# Altium PCB Flatcaster-pcb.PcbDoc (part 1 of 2)
Units mil, origin at the board's own origin, x right, y up, seen from the top; angles counter-clockwise.
Board outline 8267.72 x 2755.91 mil, 2 copper layers (Top Layer, Bottom Layer); 203 components, 114 nets, 596 pads, 141 vias.
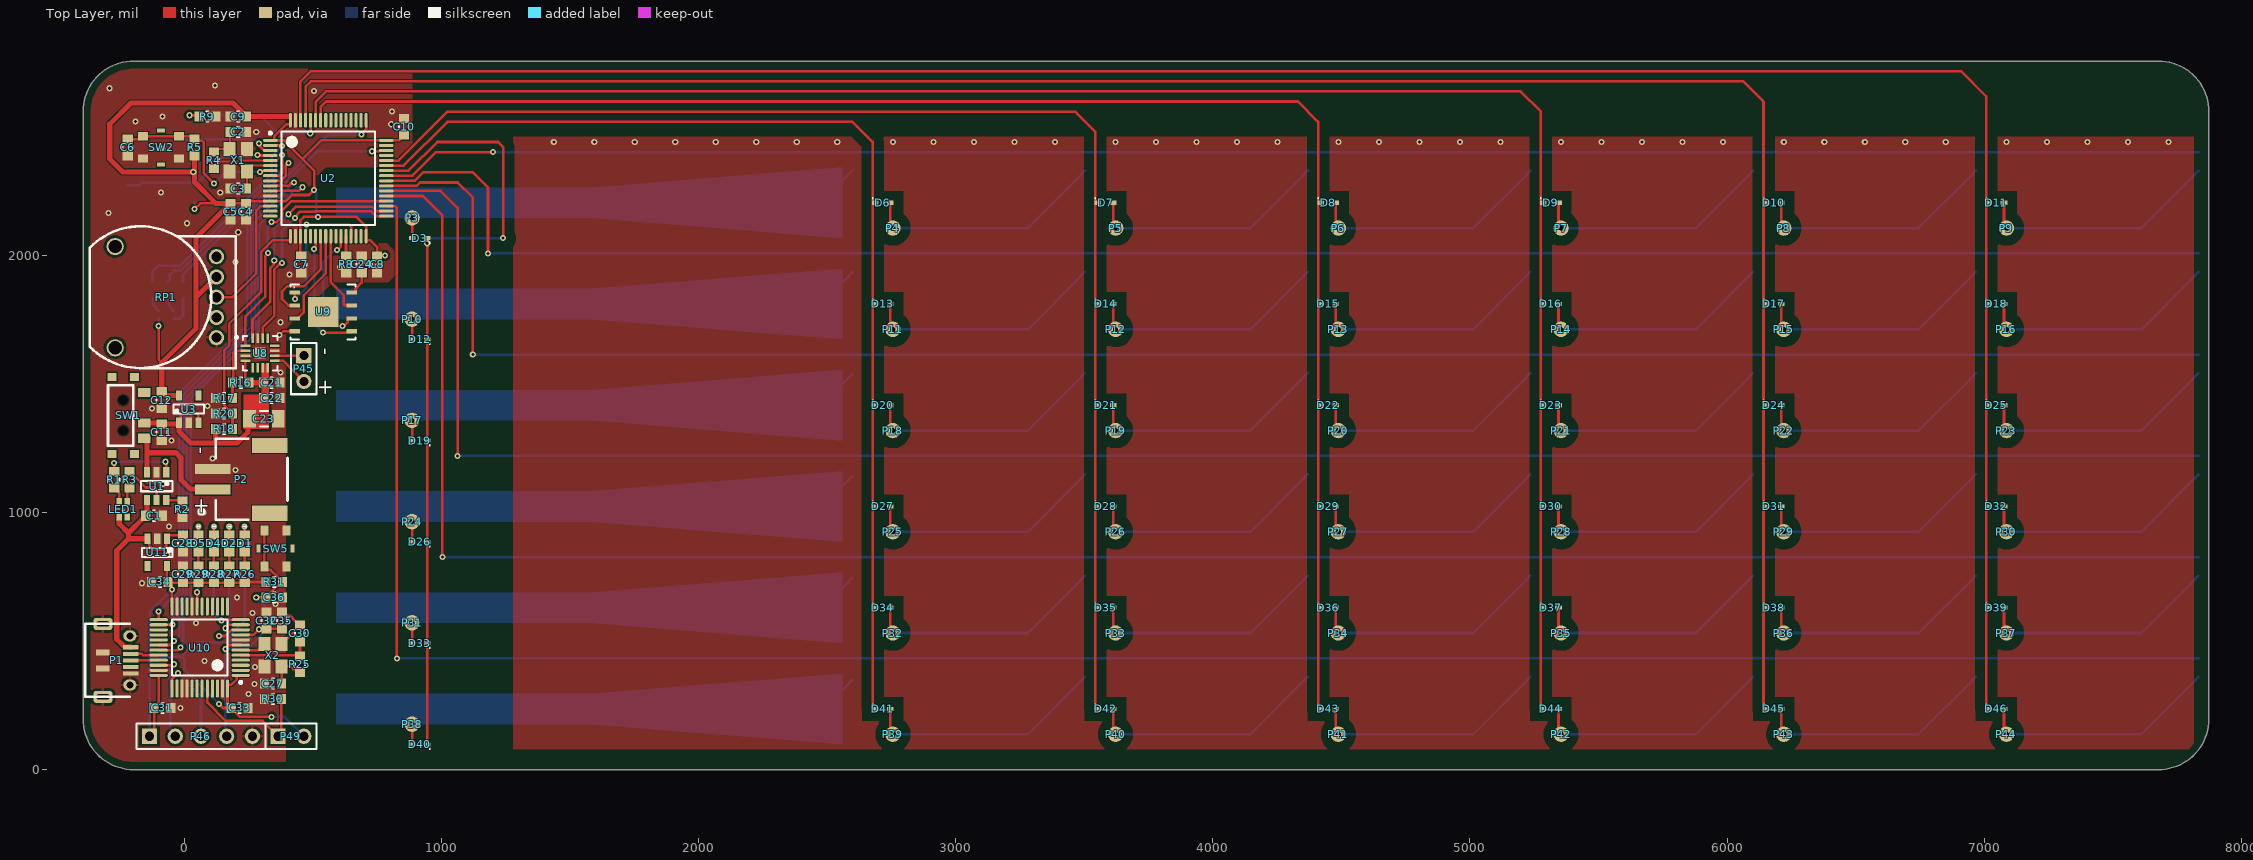
[diagram p0: Top Layer view]
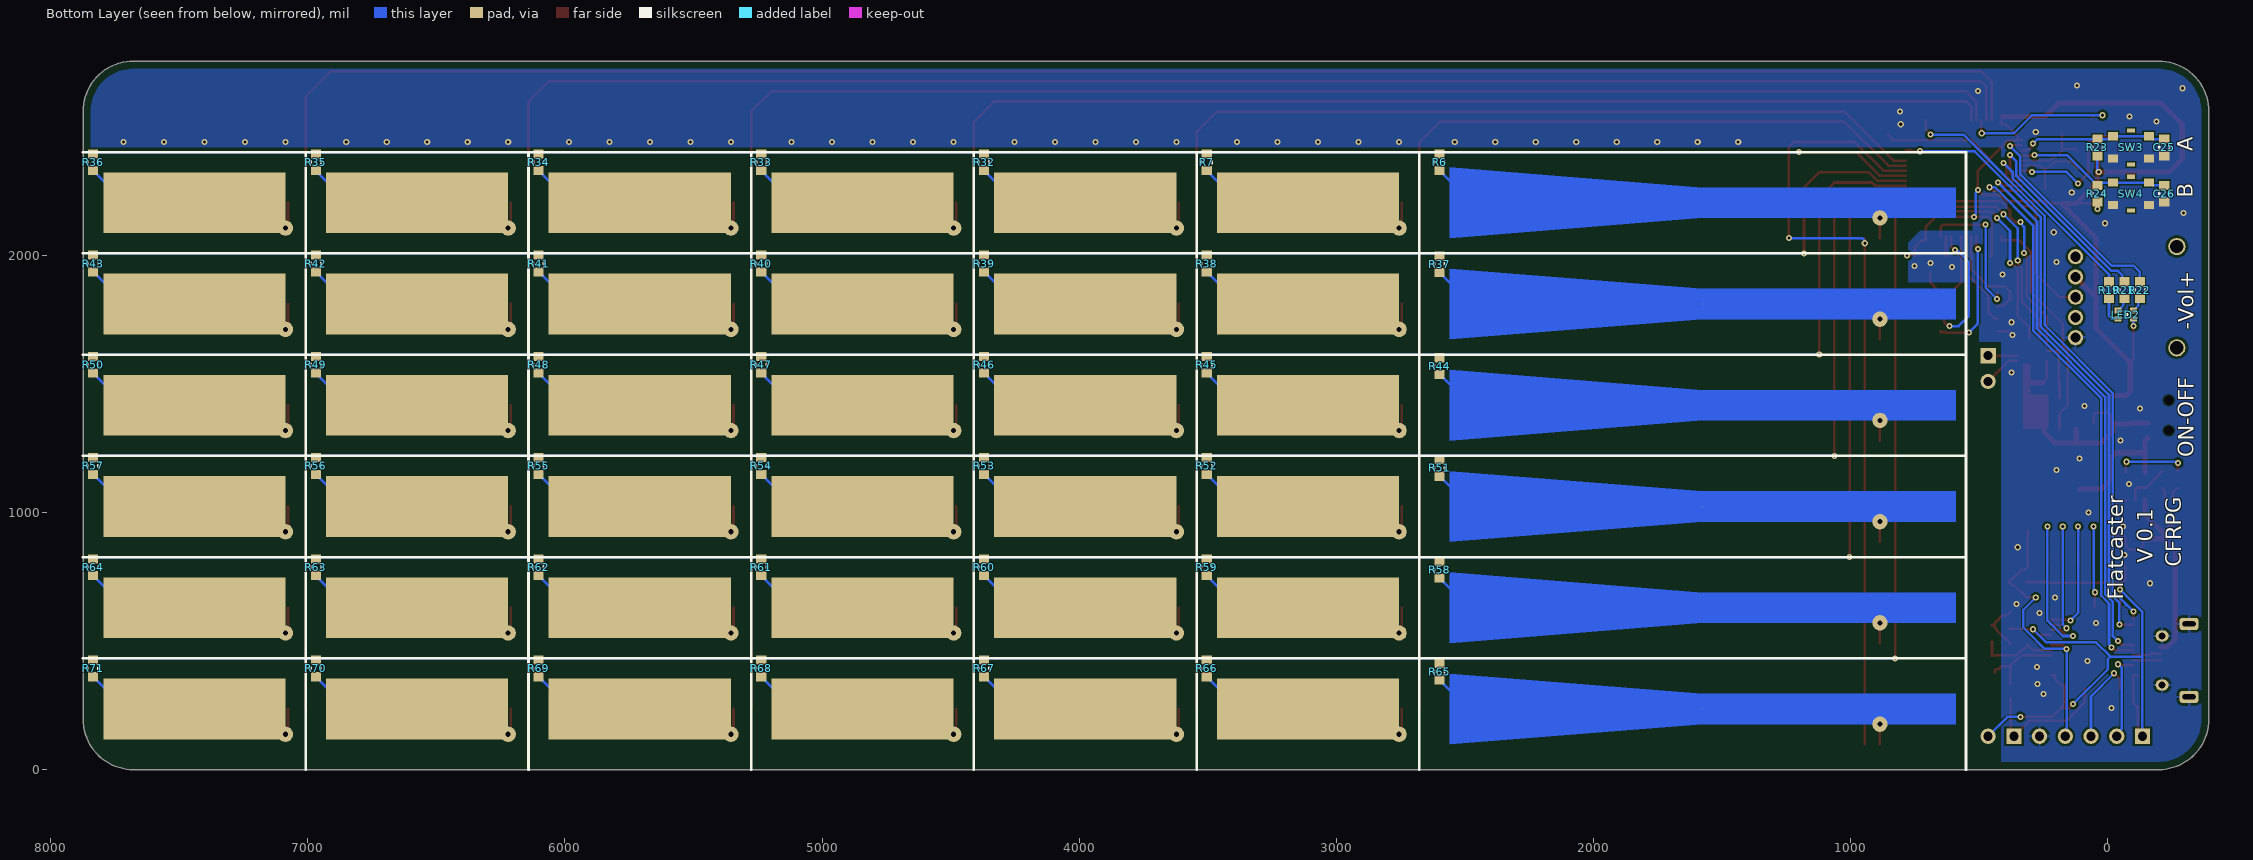
[diagram p1: Bottom Layer view, seen from below]
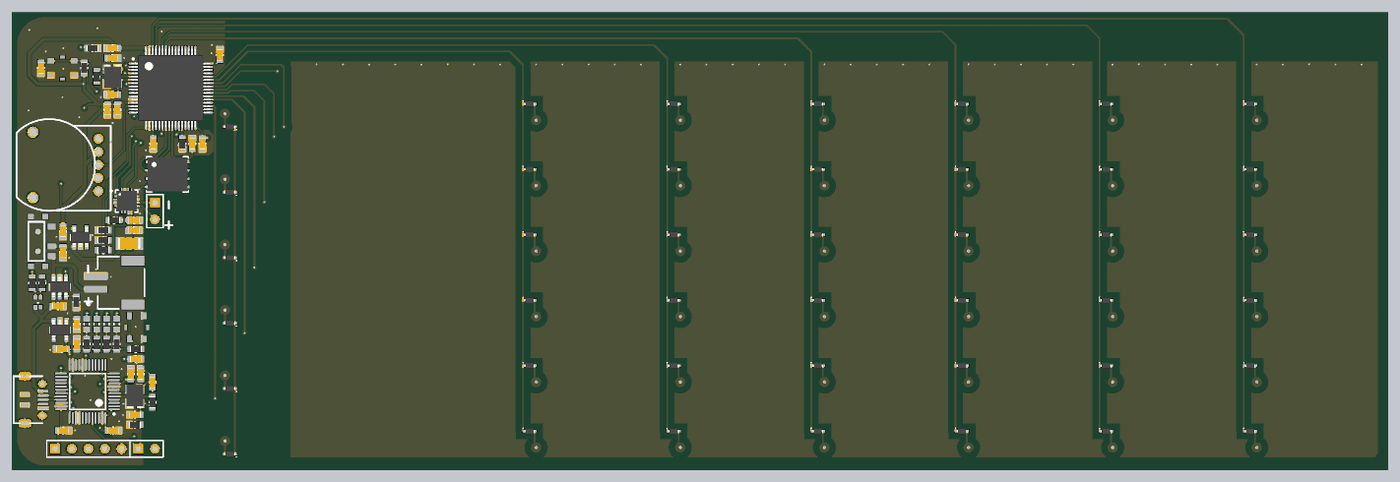
[diagram p3: 3D render of the assembled board from above, using the file's embedded part models]
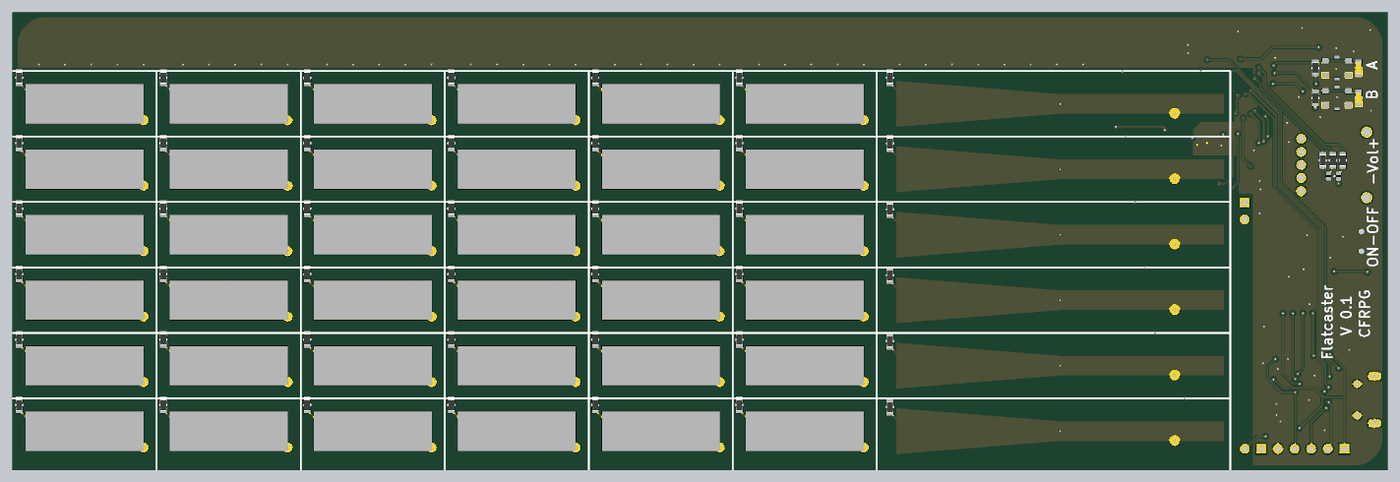
[diagram p4: 3D render of the assembled board from below, using the file's embedded part models]

## Layer stack, top to bottom
Top Solder: solder mask 0.4, Solder Resist, Dk 3.5
Top Layer: signal copper 1.4
Dielectric 1: dielectric 12.6, FR-4, Dk 4.8
Bottom Layer: signal copper 1.4
Bottom Solder: solder mask 0.4, Solder Resist, Dk 3.5

## Board outline
-196.85,0 cw(c-196.85,196.85) -393.7,196.85 -393.7,2559.06 cw(c-196.85,2559.05) -196.85,2755.91 7677.17,2755.9 cw(c7677.17,2559.05) 7874.02,2559.06 7874.02,196.85 cw(c7677.17,196.85) 7677.17,0

## Design rules (kind name [scope] priority, off if disabled: settings)
BoardOutlineClearance [All] p1: gap=15.75 ignorepadtopadclearanceinfootprint=FALSE except(30: Poly-OutlineEdge Poly-CavityEdge Poly-CutoutEdge Poly-SplitBarrior Poly-SplitContinuation)
Clearance Clearance_1 [InNamedPolygon('CAP_GND_L01_P003') Or InNamedPolygon('CAP_GND_L01_P004') Or InNamedPolygon('CAP_GND_L01_P005') Or InNamedPolygon('CAP_GND_L01_P006') Or InNamedPolygon('CAP_GND_L01_P007') Or InNamedPolygon('CAP_GND_L01_P008')] p1: gap=39.37 ignorepadtopadclearanceinfootprint=FALSE
Clearance [All] p2: gap=5 ignorepadtopadclearanceinfootprint=TRUE except(10: THPad-Fill THPad-Poly THPad-Region Via-Fill Via-Poly Via-Region Fill-Fill Fill-Poly Fill-Region Poly-Poly Poly-Region Region-Region)
PolygonConnect [All] p1: thpad.connectstyle=Relief thpad.reliefconductorwidth=10 thpad.reliefentries=4 thpad.polygonreliefangle="90 Angle" thpad.airgapwidth=10 smdpad.connectstyle=Direct smdpad.reliefconductorwidth=10 smdpad.reliefentries=4 smdpad.polygonreliefangle="90 Angle" smdpad.airgapwidth=10 via.connectstyle=Direct via.reliefconductorwidth=10 via.reliefentries=4 via.polygonreliefangle="90 Angle" via.airgapwidth=10
RoutingVias [All] p1: holewidth=11.81 width=23.62 viastyle="Through Hole" minholewidth=11.81 minwidth=23.62 maxholewidth=157.48 maxwidth=196.85
SolderMaskExpansion [All] p1: expansion=4 istentingtop=FALSE
SupplyNets "Schematic Supply Nets_18" [InNet('VBUS')] p1: voltage=0.000
SupplyNets "Schematic Supply Nets_17" [InNet('VCC_Link')] p2: voltage=0.000
SupplyNets "Schematic Supply Nets_16" [InNet('VCC_MCU')] p3: voltage=0.000
SupplyNets "Schematic Supply Nets_5" [InNet('VBAT')] p4: voltage=0.000
SupplyNets "Schematic Supply Nets_13" [InNet('+5')] p5: voltage=0.000
SupplyNets "Schematic Supply Nets_3" [InNet('VCC')] p6: voltage=0.000
SupplyNets "Schematic Supply Nets" [InNet('GND')] p7: voltage=0.000
Width [All] p1: maxlimit=20 minlimit=8 preferedwidth=10 minimp=50.000000 maximp=50.000000 favimp=50.000000
30 further rules are at their usual default settings.

## Classes and differential pairs
component class Flatcaster-sch: C1 C2 C3 C4 C5 C6 C7 C8 C9 C10 C11 C12 C21 C22 C23 C24 C25 C26 D3 D6 D7 D8 D9 D10 D11 D12 D13 D14 D15 D16 D17 D18 D19 D20 D21 D22 D23 D24 D25 D26 D27 D28 D29 D30 D31 D32 D33 D34 D35 D36 D37 D38 D39 D40 D41 D42 D43 D44 D45 D46 LED1 LED2 P1 P2 P3 P4 P5 P6 P7 P8 P9 P10 P11 P12 P13 P14 P15 P16 P17 P18 P19 P20 P21 P22 P23 P24 P25 P26 P27 P28 P29 P30 P31 P32 P33 P34 P35 P36 P37 P38 P39 P40 P41 P42 P43 P44 P45 R1 R2 R3 R4 R5 R6 R7 R8 R9 R16 R17 R18 R19 R20 R21 R22 R23 R24 R32 R33 R34 R35 R36 R37 R38 R39 R40 R41 R42 R43 R44 R45 R46 R47 R48 R49 R50 R51 R52 R53 R54 R55 R56 R57 R58 R59 R60 R61 R62 R63 R64 R65 R66 R67 R68 R69 R70 R71 RP1 SW1 SW2 SW3 SW4 U1 U2 U3 U8 U9 X1
component class Flatcaster-Link-sch: C27 C28 C29 C30 C31 C32 C33 C34 C35 C36 D1 D2 D4 D5 P46 P49 R25 R26 R27 R28 R29 R30 R31 SW5 U10 U11 X2

## Components (designator, comment, footprint, x,y, rotation, side; value= is the part's Value field where it differs from the comment)
C1 "2.2uF" 0603-Cap -117.5,987.5 r180 top
C2 "12pF" 0603-Cap 210,2480 r180 top
C3 "12pF" 0603-Cap 210,2260 r0 top
C4 "100nF" 0603-Cap 240,2170 r90 top
C5 "1uF" 0603-Cap 180,2170 r90 top
C6 "1uF" 0603-Cap -220,2420 r90 top
C7 "100nF" 0603-Cap 455,1965 r90 top
C8 "100nF" 0603-Cap 750,1965 r90 top
C9 "100nF" 0603-Cap 210,2540 r0 top
C10 "100nF" 0603-Cap 855,2500 r270 top
C11 "1uF" 0603-Cap -87.5,1312.5 r90 top
C12 "1uF" 0603-Cap -87.5,1437.5 r90 top
C21 "100nF" 0603-Cap 340,1505 r180 top
C22 "1uF" 0603-Cap 340,1445 r180 top
C23 "100uF" 1206-C 310,1365 r180 top
C24 "100nF" 0603-Cap 690,1965 r270 top
C25 "1uF" 0603-Cap -220,2420 r90 bottom
C26 "1uF" 0603-Cap -220,2240 r90 bottom
C27 "12pF" 0603-Cap 345,335 r0 top
C28 "1uF" 0603-Cap -5,880 r90 top
C29 "1uF" 0603-Cap -5,760 r270 top
C30 "12pF" 0603-Cap 450,530 r270 top
C31 "100nF" 0603-Cap -85,240 r0 top
C32 "100nF" 0603-Cap 320,580 r90 top
C33 "100nF" 0603-Cap 215,240 r0 top
C34 "100nF" 0603-Cap -95,730 r180 top
C35 "4.7uF" 0603-Cap 380,580 r90 top
C36 "1uF" 0603-Cap 350,670 r180 top
D1 "LED" 0603-1 235,880 r90 top
D2 "LED" 0603-1 175,880 r90 top
D3 "RB751S40T5G" SOD-523 915.35,2066.93 r180 top
D4 "LED" 0603-1 115,880 r90 top
D5 "LED" 0603-1 55,880 r90 top
D6 "RB751S40T5G" SOD-523 2716.54,2204.72 r0 top
D7 "RB751S40T5G" SOD-523 3582.68,2204.72 r0 top
D8 "RB751S40T5G" SOD-523 4448.82,2204.72 r0 top
D9 "RB751S40T5G" SOD-523 5314.96,2204.72 r0 top
D10 "RB751S40T5G" SOD-523 6181.1,2204.72 r0 top
D11 "RB751S40T5G" SOD-523 7047.24,2204.72 r0 top
D12 "RB751S40T5G" SOD-523 915.35,1673.23 r180 top
D13 "RB751S40T5G" SOD-523 2716.54,1811.02 r0 top
D14 "RB751S40T5G" SOD-523 3582.68,1811.02 r0 top
D15 "RB751S40T5G" SOD-523 4448.82,1811.02 r0 top
D16 "RB751S40T5G" SOD-523 5314.96,1811.02 r0 top
D17 "RB751S40T5G" SOD-523 6181.1,1811.02 r0 top
D18 "RB751S40T5G" SOD-523 7047.24,1811.02 r0 top
D19 "RB751S40T5G" SOD-523 915.35,1279.53 r180 top
D20 "RB751S40T5G" SOD-523 2716.54,1417.32 r0 top
D21 "RB751S40T5G" SOD-523 3582.68,1417.32 r0 top
D22 "RB751S40T5G" SOD-523 4448.82,1417.32 r0 top
D23 "RB751S40T5G" SOD-523 5314.96,1417.32 r0 top
D24 "RB751S40T5G" SOD-523 6181.1,1417.32 r0 top
D25 "RB751S40T5G" SOD-523 7047.24,1417.32 r0 top
D26 "RB751S40T5G" SOD-523 915.35,885.83 r180 top
D27 "RB751S40T5G" SOD-523 2716.54,1023.62 r0 top
D28 "RB751S40T5G" SOD-523 3582.68,1023.62 r0 top
D29 "RB751S40T5G" SOD-523 4448.82,1023.62 r0 top
D30 "RB751S40T5G" SOD-523 5314.96,1023.62 r0 top
D31 "RB751S40T5G" SOD-523 6181.1,1023.62 r0 top
D32 "RB751S40T5G" SOD-523 7047.24,1023.62 r0 top
D33 "RB751S40T5G" SOD-523 915.35,492.13 r180 top
D34 "RB751S40T5G" SOD-523 2716.54,629.92 r0 top
D35 "RB751S40T5G" SOD-523 3582.68,629.92 r0 top
D36 "RB751S40T5G" SOD-523 4448.82,629.92 r0 top
D37 "RB751S40T5G" SOD-523 5314.96,629.92 r0 top
D38 "RB751S40T5G" SOD-523 6181.1,629.92 r0 top
D39 "RB751S40T5G" SOD-523 7047.24,629.92 r0 top
D40 "RB751S40T5G" SOD-523 915.35,98.43 r180 top
D41 "RB751S40T5G" SOD-523 2716.54,236.22 r0 top
D42 "RB751S40T5G" SOD-523 3582.68,236.22 r0 top
D43 "RB751S40T5G" SOD-523 4448.82,236.22 r0 top
D44 "RB751S40T5G" SOD-523 5314.96,236.22 r0 top
D45 "RB751S40T5G" SOD-523 6181.1,236.22 r0 top
D46 "RB751S40T5G" SOD-523 7047.24,236.22 r0 top
LED1 "RGB_CA" RGB1.6*1.6 -237.5,1012.5 r0 top
LED2 "LTST-C19HE1WT-H" RGB1.6*1.6 -70,1770 r90 bottom
P1 "MicroUSB" MicroUSB -385,425 r270 top
P2 "Header 2" "SH2.0 2P" 110,1090 r270 top
P3 "TestPoint" TestPoint 885.83,2145.67 r180 top
P4 "TestPoint" TestPoint 2755.91,2106.3 r180 top
P5 "TestPoint" TestPoint 3622.05,2106.3 r180 top
P6 "TestPoint" TestPoint 4488.19,2106.3 r180 top
P7 "TestPoint" TestPoint 5354.33,2106.3 r180 top
P8 "TestPoint" TestPoint 6220.47,2106.3 r180 top
P9 "TestPoint" TestPoint 7086.61,2106.3 r180 top
P10 "TestPoint" TestPoint 885.83,1751.97 r270 top
P11 "TestPoint" TestPoint 2755.91,1712.6 r180 top
P12 "TestPoint" TestPoint 3622.05,1712.6 r270 top
P13 "TestPoint" TestPoint 4488.19,1712.6 r270 top
P14 "TestPoint" TestPoint 5354.33,1712.6 r270 top
P15 "TestPoint" TestPoint 6220.47,1712.6 r270 top
P16 "TestPoint" TestPoint 7086.61,1712.6 r270 top
P17 "TestPoint" TestPoint 885.83,1358.27 r270 top
P18 "TestPoint" TestPoint 2755.91,1318.9 r270 top
P19 "TestPoint" TestPoint 3622.05,1318.9 r270 top
P20 "TestPoint" TestPoint 4488.19,1318.9 r270 top
P21 "TestPoint" TestPoint 5354.33,1318.9 r180 top
P22 "TestPoint" TestPoint 6220.47,1318.9 r270 top
P23 "TestPoint" TestPoint 7086.61,1318.9 r270 top
P24 "TestPoint" TestPoint 885.83,964.57 r270 top
P25 "TestPoint" TestPoint 2755.91,925.2 r270 top
P26 "TestPoint" TestPoint 3622.05,925.2 r270 top
P27 "TestPoint" TestPoint 4488.19,925.2 r270 top
P28 "TestPoint" TestPoint 5354.33,925.2 r270 top
P29 "TestPoint" TestPoint 6220.47,925.2 r270 top
P30 "TestPoint" TestPoint 7086.61,925.2 r270 top
P31 "TestPoint" TestPoint 885.83,570.87 r180 top
P32 "TestPoint" TestPoint 2755.91,531.5 r270 top
P33 "TestPoint" TestPoint 3622.05,531.5 r270 top
P34 "TestPoint" TestPoint 4488.19,531.5 r270 top
P35 "TestPoint" TestPoint 5354.33,531.5 r270 top
P36 "TestPoint" TestPoint 6220.47,531.5 r270 top
P37 "TestPoint" TestPoint 7086.61,531.5 r270 top
P38 "TestPoint" TestPoint 885.83,177.17 r270 top
P39 "TestPoint" TestPoint 2755.91,137.8 r270 top
P40 "TestPoint" TestPoint 3622.05,137.8 r270 top
P41 "TestPoint" TestPoint 4488.19,137.8 r180 top
P42 "TestPoint" TestPoint 5354.33,137.8 r270 top
P43 "TestPoint" TestPoint 6220.47,137.8 r270 top
P44 "TestPoint" TestPoint 7086.61,137.8 r270 top
P45 "Header 2" HDR1X2 465,1610 r270 top
P46 "Header 5" HDR1X5 -135,130 r0 top
P49 "Header 2" HDR1X2 365,130 r0 top
R1 "1k" 0603 -272.5,1127.5 r90 top
R2 "2k" 0603 -7.5,1012.5 r270 top
R3 "1k" 0603 -212.5,1127.5 r90 top
R4 "1M" 0603 115,2370 r90 top
R5 "10k" 0603 40,2420 r90 top
R6 "470k" 0603 2598.43,2362.2 r270 bottom
R7 "470k" 0603 3503.94,2362.2 r270 bottom
R8 "10k" 0603 630,1965 r90 top
R9 "10k" 0603 90,2540 r180 top
R16 "NC" 0603 220,1505 r180 top
R17 "0R" 0603 155,1445 r0 top
R18 "1k" 0603 155,1325 r180 top
R19 "1k" 0603 -5,1865 r90 bottom
R20 "1k" 0603 155,1385 r0 top
R21 "1k" 0603 -65,1865 r90 bottom
R22 "1k" 0603 -125,1865 r90 bottom
R23 "10k" 0603 40,2420 r90 bottom
R24 "10k" 0603 40,2240 r90 bottom
R25 "1M" 0603 450,410 r270 top
R26 "1k" 0603 235,760 r270 top
R27 "1k" 0603 175,760 r270 top
R28 "1k" 0603 115,760 r270 top
R29 "1k" 0603 55,760 r270 top
R30 "10k" 0603 345,275 r180 top
R31 "10k" 0603 350,730 r0 top
R32 "470k" 0603 4370.08,2362.2 r270 bottom
R33 "470k" 0603 5236.22,2362.2 r270 bottom
R34 "470k" 0603 6102.36,2362.2 r270 bottom
R35 "470k" 0603 6968.5,2362.2 r270 bottom
R36 "470k" 0603 7834.65,2362.2 r270 bottom
R37 "470k" 0603 2598.43,1965.94 r270 bottom
R38 "470k" 0603 3503.94,1968.5 r270 bottom
R39 "470k" 0603 4370.08,1968.5 r270 bottom
R40 "470k" 0603 5236.22,1968.5 r270 bottom
R41 "470k" 0603 6102.36,1968.5 r270 bottom
R42 "470k" 0603 6968.5,1968.5 r270 bottom
R43 "470k" 0603 7834.65,1968.5 r270 bottom
R44 "470k" 0603 2598.43,1569.68 r270 bottom
R45 "470k" 0603 3503.94,1574.8 r270 bottom
R46 "470k" 0603 4370.08,1574.8 r270 bottom
R47 "470k" 0603 5236.22,1574.8 r270 bottom
R48 "470k" 0603 6102.36,1574.8 r270 bottom
R49 "470k" 0603 6968.5,1574.8 r270 bottom
R50 "470k" 0603 7834.65,1574.8 r270 bottom
R51 "470k" 0603 2598.43,1173.43 r270 bottom
R52 "470k" 0603 3503.94,1181.1 r270 bottom
R53 "470k" 0603 4370.08,1181.1 r270 bottom
R54 "470k" 0603 5236.22,1181.1 r270 bottom
R55 "470k" 0603 6102.36,1181.1 r270 bottom
R56 "470k" 0603 6968.5,1181.1 r270 bottom
R57 "470k" 0603 7834.65,1181.1 r270 bottom
R58 "470k" 0603 2598.43,777.17 r270 bottom
R59 "470k" 0603 3503.94,787.4 r270 bottom
R60 "470k" 0603 4370.08,787.4 r270 bottom
R61 "470k" 0603 5236.22,787.4 r270 bottom
R62 "470k" 0603 6102.36,787.4 r270 bottom
R63 "470k" 0603 6968.5,787.4 r270 bottom
R64 "470k" 0603 7834.65,787.4 r270 bottom
R65 "470k" 0603 2598.43,380.91 r270 bottom
R66 "470k" 0603 3503.94,393.7 r270 bottom
R67 "470k" 0603 4370.08,393.7 r270 bottom
R68 "470k" 0603 5236.22,393.7 r270 bottom
R69 "470k" 0603 6102.36,393.7 r270 bottom
R70 "470k" 0603 6968.5,393.7 r270 bottom
R71 "470k" 0603 7834.65,393.7 r270 bottom
RP1 "RPx2" RK10J -170.28,1837.48 r90 top
SW1 "SW-SPDT" TA-3524A-A1 -237.5,1377.5 r90 top
SW2 "TS-1177" BTN3*3 -90,2420 r0 top
SW3 "TS-1177" BTN3*3 -90,2420 r180 bottom
SW4 "TS-1177" BTN3*3 -90,2240 r180 bottom
SW5 "TS-1177" BTN3*3 355,860 r90 top
U1 "TP4057ST26P" SOT236 -107.5,1102.5 r270 top
U2 "AT32F435RxT7" LQFP-64 560,2300 r0 top
U3 "TPS7A2033PDBV" SOT23-5 17.5,1402.5 r90 top
U8 "MAX98357A" QFN16-0.5-1.1PAD 295,1620 r0 top
U9 "W25Q256JVEIQ" WPDFN-8-6x5 540,1780 r0 top
U10 "AT32F403ACGT" STM-LQFP48_N 60,475 r180 top
U11 "TPS7A2033PDBV" SOT23-5 -105,845 r270 top
X1 "8M" XTAL-3225-4P 210,2370 r90 top
X2 "8M" XTAL-3225-4P 345,445 r270 top

## Footprints (in the part's own frame and the unit in brackets; to place one, negate y for a bottom-side part, rotate by r counter-clockwise, add the part's x,y. Pads: shape width x height; smd on the part's side, far side on the other; paste and mask are expansions set on the pad)
0603 [mm]
  rect 0.9x1 smd: 1(-0.825,0) 2(0.825,0)
  silkscreen extent -0.1,-0.5 0.1,0.5, body extent -0.87,-0.48 0.87,0.48, height 0.5
0603-1 [mm]
  rect 0.9x1 smd: 1(-0.825,0) 2(0.825,0)
  silkscreen extent -0.1,-0.4 1.65,0.4
0603-Cap [mm]
  rect 0.9x1 smd: 1(-0.825,0) 2(0.825,0)
  silkscreen extent -0.1,-0.5 0.1,0.5, body extent -0.87,-0.48 0.87,0.48, height 0.5
1206-C [mm] "Chip Capacitor, 2-Leads, Body 3.20x1.60mm, IPC Medium Density"
  rect 1.25x1.75 smd: 1(-1.425,0) 2(1.425,0)
  silkscreen extent -0.4,-0.77 0.4,0.77, body extent -1.7,-0.85 1.7,0.85, height 1.2
BTN3*3 [mm]
  rect 1x0.8 smd: 1(-1.775,1.1) 1(1.775,1.1) 2(-1.775,-1.1) 2(1.775,-1.1)
  rect 0.8x0.4 smd: ""(0,-1.675) ""(0,1.675)
HDR1X2 [mm] "Connector; Header; 2 Position"
  rect 1.5x1.5 hole 0.9: 1(0,0)
  round 1.5 hole 0.9: 2(2.54,0)
  silkscreen extent -1.27,-1.27 3.81,1.27
HDR1X5 [mm] "Connector; Header; 5 Position"
  rect 1.5x1.5 hole 0.9: 1(0,0)
  round 1.5 hole 0.9: 2(2.54,0) 3(5.08,0) 4(7.62,0) 5(10.16,0)
  silkscreen extent -1.27,-1.27 11.43,1.27
LQFP-64 [mm] "TSQFP, 64-Leads, Body 10.00x10.00mm, Pitch 0.50mm, IPC Medium Density"
  oval 1.45x0.3 smd: 1(-5.725,3.75) 2(-5.725,3.25) 3(-5.725,2.75) 4(-5.725,2.25) 5(-5.725,1.75) 6(-5.725,1.25) 7(-5.725,0.75) 8(-5.725,0.25) 9(-5.725,-0.25) 10(-5.725,-0.75) 11(-5.725,-1.25) 12(-5.725,-1.75) 13(-5.725,-2.25) 14(-5.725,-2.75) 15(-5.725,-3.25) 16(-5.725,-3.75) 33(5.725,-3.75) 34(5.725,-3.25) 35(5.725,-2.75) 36(5.725,-2.25) 37(5.725,-1.75) 38(5.725,-1.25) 39(5.725,-0.75) 40(5.725,-0.25) 41(5.725,0.25) 42(5.725,0.75) 43(5.725,1.25) 44(5.725,1.75) 45(5.725,2.25) 46(5.725,2.75) 47(5.725,3.25) 48(5.725,3.75)
  oval 0.3x1.45 smd: 17(-3.75,-5.725) 18(-3.25,-5.725) 19(-2.75,-5.725) 20(-2.25,-5.725) 21(-1.75,-5.725) 22(-1.25,-5.725) 23(-0.75,-5.725) 24(-0.25,-5.725) 25(0.25,-5.725) 26(0.75,-5.725) 27(1.25,-5.725) 28(1.75,-5.725) 29(2.25,-5.725) 30(2.75,-5.725) 31(3.25,-5.725) 32(3.75,-5.725) 49(3.75,5.725) 50(3.25,5.725) 51(2.75,5.725) 52(2.25,5.725) 53(1.75,5.725) 54(1.25,5.725) 55(0.75,5.725) 56(0.25,5.725) 57(-0.25,5.725) 58(-0.75,5.725) 59(-1.25,5.725) 60(-1.75,5.725) 61(-2.25,5.725) 62(-2.75,5.725) 63(-3.25,5.725) 64(-3.75,5.725)
  silkscreen extent -5.85,-4.6 4.6,4.6, body extent -6,-6 6,6, height 1.45
MicroUSB [mm]
  rect 0.4x1.55 smd: 1(-1.3,4.5) 2(-0.65,4.5) 3(0,4.5) 4(0.65,4.5) 5(1.3,4.5)
  rrect50% 1.2x1.9 hole 1.3 slot 0.5 at 0 deg: 6(-3.6,1.75) 6(3.6,1.75)
  oval 1.1x1.3 hole 0.7: 6(-2.425,4.4) 6(2.425,4.4)
  rect 0.6x1.35 smd: 6(-0.8,1.725) 6(0.8,1.725)
  silkscreen extent -3.6,0 3.6,4.4
QFN16-0.5-1.1PAD [mm] "QFN, 16-Leads, Body 3.00x3.00mm, Pitch 0.50mm, Thermal Pad 1.10x1.10mm, IPC Medium Density"
  rect 0.95x0.25 smd: 1(-1.45,0.75) 2(-1.45,0.25) 3(-1.45,-0.25) 4(-1.45,-0.75) 9(1.45,-0.75) 10(1.45,-0.25) 11(1.45,0.25) 12(1.45,0.75)
  rect 0.25x0.95 smd: 5(-0.75,-1.45) 6(-0.25,-1.45) 7(0.25,-1.45) 8(0.75,-1.45) 13(0.75,1.45) 14(0.25,1.45) 15(-0.25,1.45) 16(-0.75,1.45)
  rect 1.1x1.1 smd: 17(0,0)
  silkscreen extent -2.47,-1.7 1.7,1.7, body extent -1.6,-1.6 1.6,1.6, height 0.8
RGB1.6*1.6 [mm]
  rect 0.55x0.7 smd: 1(-0.4,0.75) 2(0.4,0.75) 3(0.4,-0.75) 4(-0.4,-0.75)
  silkscreen extent -0.08,-0.2 0.08,-0.05
RK10J [mm] "RK10J/RK14J"
  round 1.5 hole 1: 1(-4,-7.5) 2(-2,-7.5) 3(0,-7.5) 4(2,-7.5) 5(4,-7.5)
  round 1.7 hole 1.3: ""(-5,2.5) ""(5,2.5)
  silkscreen extent -7,-9.4 7,5
"SH2.0 2P" [mm]
  rect 1.5x3.5 smd: 0(-4.35,5.65) 0(2.35,5.65)
  rect 1x3.5 smd: 1(0,0) 2(-2,0)
  silkscreen extent -5,-1.3 3,7.4
SOD-523 [mm]
  rect 0.65x0.4 smd: 1(0.75,0) 2(-0.75,0)
  silkscreen extent -1.05,0.4 -0.95,0.5, body extent -0.8,-0.45 0.8,0.45, height 0.7
SOT23-5 [mm]
  rect 1x0.6 smd: 1(-1.35,0.95) 2(-1.35,0) 3(-1.35,-0.95) 4(1.35,-0.95) 5(1.35,0.95)
  silkscreen extent -0.45,-1.5 0.45,1.5, body extent -1.5,-1.5 1.5,1.5, height 1.5
SOT236 [mm] "SOT23, 6-Leads, Body 2.90x2.80mm, Pitch 0.95mm, IPC Medium Density"
  rect 1x0.6 smd: 1(-1.375,0.95) 2(-1.375,0) 3(-1.375,-0.95) 4(1.375,-0.95) 5(1.375,0) 6(1.375,0.95)
  silkscreen extent -0.5,-1.55 0.5,1.55, body extent -1.53,-1.53 1.53,1.53, height 1.1
STM-LQFP48_N [mm] "QFP, 48-Leads, Body 7x7mm, Pitch 0.5mm, IPC Medium Density"
  oval 1.8x0.3 smd: 1(-4.05,2.75) 2(-4.05,2.25) 3(-4.05,1.75) 4(-4.05,1.25) 5(-4.05,0.75) 6(-4.05,0.25) 7(-4.05,-0.25) 8(-4.05,-0.75) 9(-4.05,-1.25) 10(-4.05,-1.75) 11(-4.05,-2.25) 12(-4.05,-2.75) 25(4.05,-2.75) 26(4.05,-2.25) 27(4.05,-1.75) 28(4.05,-1.25) 29(4.05,-0.75) 30(4.05,-0.25) 31(4.05,0.25) 32(4.05,0.75) 33(4.05,1.25) 34(4.05,1.75) 35(4.05,2.25) 36(4.05,2.75)
  oval 0.3x1.8 smd: 13(-2.75,-4.05) 14(-2.25,-4.05) 15(-1.75,-4.05) 16(-1.25,-4.05) 17(-0.75,-4.05) 18(-0.25,-4.05) 19(0.25,-4.05) 20(0.75,-4.05) 21(1.25,-4.05) 22(1.75,-4.05) 23(2.25,-4.05) 24(2.75,-4.05) 37(2.75,4.05) 38(2.25,4.05) 39(1.75,4.05) 40(1.25,4.05) 41(0.75,4.05) 42(0.25,4.05) 43(-0.25,4.05) 44(-0.75,4.05) 45(-1.25,4.05) 46(-1.75,4.05) 47(-2.25,4.05) 48(-2.75,4.05)
  silkscreen extent -4.18,-2.75 2.75,3.57, body extent -3.5,-3.5 3.5,3.5, height 1.6
TA-3524A-A1 [mm]
  rect 0.9x1.25 smd: 1(-0.75,-2.075) 2(-2.25,-2.075) 3(2.25,-2.075)
  rect 0.8x0.9 smd: ""(-3.8,-1.1) ""(-3.8,1.1) ""(3.8,-1.1) ""(3.8,1.1)
  round 0 hole 0.9: ""(-1.5,0) ""(1.5,0)
  silkscreen extent -3,-1 3,1.5
TestPoint [mil]
  round 60 hole 19.68 mask+4: 1(0,0)
WPDFN-8-6x5 [mm] "SON, 8-Leads, Body 5.00x6.00mm, Pitch 1.27mm, Thermal Pad 3.00x3.00mm, IPC Medium Density"
  rect 1.05x0.4 smd: 1(-2.82,1.905) 2(-2.82,0.635) 3(-2.82,-0.635) 4(-2.82,-1.905) 5(2.82,-1.905) 6(2.82,-0.635) 7(2.82,0.635) 8(2.82,1.905)
  rect 3x3 smd paste-1.5: 9(0,0)
  silkscreen extent -3.2,-2.7 3.2,2.7, body extent -3.05,-2.55 3.05,2.55, height 0.8
XTAL-3225-4P [mm] "DFN, 4-Leads, Body 2.50x3.20mm, Pitch 2.20mm, IPC Medium Density"
  rect 1.4x1.2 smd: 1(-1.1,-0.85) 2(1.1,-0.85) 3(1.1,0.85) 4(-1.1,0.85)
  body extent -1.8,-1.3 1.78,1.3, height 0.8

## Part data
C1 C2 C3 C4 C5 C6 C7 C8 C9 C10 C11 C12 C21 C22 C23 C24 C25 C26 C27 C28 C29 C30 C31 C32 C33 C34 C35 C36: library part Cap
D3 D6 D7 D8 D9 D10 D11 D12 D13 D14 D15 D16 D17 D18 D19 D20 D21 D22 D23 D24 D25 D26 D27 D28 D29 D30 D31 D32 D33 D34 D35 D36 D37 D38 D39 D40 D41 D42 D43 D44 D45 D46: library part Diode
LED2: library part RGB_CA, "C427425"
P2 P45 P49: "Header, 2-Pin", LatestRevisionDate=17-Jul-2002, LatestRevisionNote="Re-released for DXP Platform.", Publisher="Altium Limited"
P46: "Header, 5-Pin", LatestRevisionDate=17-Jul-2002, LatestRevisionNote="Re-released for DXP Platform.", Publisher="Altium Limited"
R1 R2 R3 R4 R5 R6 R7 R8 R9 R16 R17 R18 R19 R20 R21 R22 R23 R24 R25 R26 R27 R28 R29 R30 R31 R32 R33 R34 R35 R36 R37 R38 R39 R40 R41 R42 R43 R44 R45 R46 R47 R48 R49 R50 R51 R52 R53 R54 R55 R56 R57 R58 R59 R60 R61 R62 R63 R64 R65 R66 R67 R68 R69 R70 R71: library part Res
SW1: "C514014"
SW2 SW3 SW4 SW5: library part Btn, "C561512"
U3 U11: library part ME6211
U9: library part W25QxxxVE/A
U10: library part STM32F103CBT6, I/Os (High Current)=37, Operating Frequency(F) (Processor speed) (MHz)=72, Supplier Part Number 1=497-6288-ND, Supply Voltage(Vcc) min (V)=2, A/D Converter="2x12-bit (10 Channel)", ComponentLink1Description="Manufacturer URL", ComponentLink1URL=http://www.st.com/web/en/home.html, ComponentLink2Description=Datasheet, ComponentLink2URL=http://www.st.com/st-web-ui/static/active/en/resource/technical/document/datasheet/CD00161566.pdf, ComponentLink3Description="Package Specification", ComponentLink3URL=http://www.st.com/st-web-ui/static/active/en/resource/technical/document/datasheet/DM00058181.pdf, Core="ARM Cortex-M3", DatasheetVersion="Rev. 16", FLASH Size (Prog) (kB)=128, Internal RAM Size (kB)=20, Mounting Technology="Surface Mount", PackageDescription="48-Pin Low Profile Quad Flat Package, 7 x 7 mm Body, 0.5 mm Pitch", PackageReference=LQFP48, PackageVersion="Rev. 6, 06/2013", Packing=Tray, PartNumber=STM32F103CBT6, Supplier 1=Digi-Key, Supplier 2=Farnell, Supplier 3=Newark, Supplier 4=Newark, Supplier 5=Mouser, Supplier Part Number 2=1606327, Supplier Part Number 3=11N8296, Supplier Part Number 4=57P1214, Supplier Part Number 5=511-STM32F103CBT6
X1 X2: library part XTAL-4LEAD, "C2682774"

## Free pads (board coordinates)
  round 1 smd far side: ""(1574.8,236.22) ""(1574.8,629.92) ""(1574.8,1417.32) ""(1574.8,1811.02) ""(1574.8,2204.72) ""(1574.8,1023.62)
  rect 708.66x236.22 smd far side: ""(3110.24,236.22) ""(3110.24,629.92) ""(3110.24,1023.62) ""(3110.24,1417.32) ""(3110.24,1811.02) ""(3110.24,2204.72) ""(3976.38,236.22) ""(3976.38,629.92) ""(3976.38,1023.62) ""(3976.38,1417.32) ""(3976.38,1811.02) ""(3976.38,2204.72) ""(4842.52,236.22) ""(4842.52,629.92) ""(4842.52,1023.62) ""(4842.52,1417.32) ""(4842.52,1811.02) ""(4842.52,2204.72) ""(5708.66,236.22) ""(5708.66,629.92) ""(5708.66,1023.62) ""(5708.66,1417.32) ""(5708.66,1811.02) ""(5708.66,2204.72) ""(6574.8,236.22) ""(6574.8,629.92) ""(6574.8,1023.62) ""(6574.8,1417.32) ""(6574.8,1811.02) ""(6574.8,2204.72) ""(7440.94,236.22) ""(7440.94,629.92) ""(7440.94,1023.62) ""(7440.94,1417.32) ""(7440.94,1811.02) ""(7440.94,2204.72)

## Via types
v1: diameter 23.62, hole 11.81, Top Layer to Bottom Layer, tented both sides, 141 vias

## Nets (pads, with @x,y where several pads share a name; then routed paths per layer and width w, separated by ;. In a path a pad name is that pad's centre, name@x,y a point inside that pad or via, vN(x,y) a via of type N, cw(c..) or ccw(c..) an arc to the next point about the centre after c; other vN are vias at no path point)
+5: C11.2 C21.2 C22.2 C23.2 R16.1 R18.2 SW1.1 U3.1 U3.3 U8.4 U8.7 U8.8 | length 878.9
  Top Layer w10: U3.1@-19.9,1349.35 -13.92,1355.33 -13.92,1376.08 -2.5,1387.5 47.5,1387.5 54.9,1380.1 U3.3@54.9,1349.35 ; U8.4@237.91,1590.47 237.91,1521.54 252.48,1506.97 R16.1@252.48,1505
  Top Layer w20: SW1.1@-155.81,1347.97 -90.49,1347.97 C11.2@-87.5,1344.98 -21.71,1344.98 U3.1@-19.9,1346.79 ; U3.1@-19.9,1349.35 U3.1@-19.9,1346.79 ; R18.2@122.52,1325 122.52,1277.52 115,1270 ; C23.2@250,1370 253.9,1366.1 C23.2@253.9,1365 247.27,1358.37 247.27,1312.27 205,1270 115,1270 ; R16.1@252.48,1505 C21.2@307.52,1505 ; U3.1@-19.9,1346.79 -19.9,1314.9 25,1270 115,1270
ADC_BATT: R18.1 R20.2 U2.17 | length 910
  Top Layer w10: R18.1@187.48,1325 R20.2@187.48,1385 187.48,1386.97 174.76,1399.69 172.8,1399.69 155,1417.48 155,1630 175,1650 175,1735 300,1860 300,2015 344.56,2059.56 411.53,2059.56 412.36,2060.4 U2.17@412.36,2074.61
ADC_VOL: RP1.3 U2.14 | length 500
  Top Layer w10: RP1.3@125,1837.48 187.78,1837.5 280,1929.72 280,2175 296.73,2191.73 U2.14@334.61,2191.73
BOOT0_Link: P49.1 R30.1 U10.44 | length 534.8
  Top Layer w10: U10.44@89.53,315.55 89.53,260.47 160,190 305,190 P49.1@365,130 377.48,142.48 R30.1@377.48,275
D+: P1.3 U10.33 | length 108.7
  Top Layer w10: P1.3@-207.83,425 -130.25,425 -129.47,425.79 U10.33@-99.45,425.79
D-: P1.2 U10.32 | length 110.9
  Top Layer w10: P1.2@-207.83,450.59 -165.59,450.59 -160,445 -130.73,445 -130.6,445.13 -99.8,445.13 U10.32@-99.45,445.47
DRV_C1: R6.1 R7.1 R32.1 R33.1 R34.1 R35.1 R36.1 U2.41 | length 7087.2
  Top Layer w10: U2.41@785.39,2309.84 887.74,2309.84 979.48,2401.57 v1(1200.79,2401.57)
  Bottom Layer w10: v1(1200.79,2401.57) 3503.94,2401.57 4370.08,2401.57 5236.22,2401.57 6102.36,2401.57 6968.5,2401.57 R36.1@7834.65,2401.57
DRV_C2: R37.1 R38.1 R39.1 R40.1 R41.1 R42.1 R43.1 U2.40 | length 7343.2
  Top Layer w10: U2.40@785.39,2290.16 895.9,2290.16 928.57,2322.83 1122.05,2322.83 1181.1,2263.78 v1(1181.1,2007.87)
  Bottom Layer w10: v1(1181.1,2007.87) 3503.94,2007.87 4370.08,2007.87 5236.22,2007.87 6102.36,2007.87 6968.5,2007.87 R43.1@7834.65,2007.87
DRV_C3: R44.1 R45.1 R46.1 R47.1 R48.1 R49.1 R50.1 U2.39 | length 7689.3
  Top Layer w10: U2.39@785.39,2270.47 904.05,2270.47 917.04,2283.46 1062.99,2283.46 1122.05,2224.41 v1(1122.05,1614.17)
  Bottom Layer w10: v1(1122.05,1614.17) R50.1@7834.65,1614.17
DRV_C4: R51.1 R52.1 R53.1 R54.1 R55.1 R56.1 R57.1 U2.38 | length 8041.1
  Top Layer w10: U2.38@785.39,2250.79 997.24,2250.79 1062.99,2185.04 v1(1062.99,1220.47)
  Bottom Layer w10: v1(1062.99,1220.47) 3503.94,1220.47 4370.08,1220.47 5236.22,1220.47 6102.36,1220.47 6968.5,1220.47 R57.1@7834.65,1220.47
DRV_C5: R58.1 R59.1 R60.1 R61.1 R62.1 R63.1 R64.1 U2.37 | length 8409.3
  Top Layer w10: U2.37@785.39,2231.1 928.35,2231.1 1003.94,2155.51 v1(1003.94,826.77)
  Bottom Layer w10: v1(1003.94,826.77) 4370.08,826.77 5236.22,826.77 6102.36,826.77 6968.5,826.77 R64.1@7834.65,826.77
DRV_C6: R65.1 R66.1 R67.1 R68.1 R69.1 R70.1 R71.1 U2.35 | length 8804
  Top Layer w10: U2.35@785.39,2191.73 820.08,2191.73 826.77,2185.04 v1(826.77,433.07)
  Bottom Layer w10: v1(826.77,433.07) 4370.08,433.07 5236.22,433.07 6102.36,433.07 6968.5,433.07 R71.1@7834.65,433.07
FRET_0: D3.2 D12.2 D19.2 D26.2 D33.2 D40.2 U2.42 | length 3141
  Top Layer w10: U2.42@785.39,2329.53 872.83,2329.53 984.25,2440.94 1220.47,2440.94 1240.16,2421.26 v1(1240.16,2066.93) ; D40.2@944.88,98.43 D33.2@944.88,492.13 D26.2@944.88,885.83 D19.2@944.88,1279.53 D12.2@944.88,1673.23 v1(944.88,2047.24) D3.2@944.88,2066.93
  Bottom Layer w10: v1(944.88,2047.24) 947.49,2049.85 947.49,2059.59 954.83,2066.93 v1(1240.16,2066.93)
FRET_1: D6.2 D13.2 D20.2 D27.2 D34.2 D41.2 U2.43 | length 4199.7
  Top Layer w10: U2.43@785.39,2349.21 853.15,2349.21 1023.62,2519.69 2598.43,2519.69 2677.17,2440.94 2677.17,2204.72 2677.17,1811.02 2677.17,1417.32 2677.17,1023.62 2677.17,629.92 D41.2@2677.17,236.22
FRET_2: D7.2 D14.2 D21.2 D28.2 D35.2 D42.2 U2.44 | length 5113.4
  Top Layer w10: U2.44@785.39,2368.9 833.46,2368.9 1023.62,2559.06 3464.57,2559.06 3543.31,2480.31 3543.31,2204.72 3543.31,1811.02 3543.31,1417.32 3543.31,1023.62 3543.31,629.92 D42.2@3543.31,236.22
FRET_3: D8.2 D15.2 D22.2 D29.2 D36.2 D43.2 U2.58 | length 6256
  Top Layer w10: U2.58@530.47,2525.39 530.47,2577.72 551.18,2598.43 4330.71,2598.43 4409.45,2519.69 4409.45,2204.72 4409.45,1811.02 4409.45,1417.32 4409.45,1023.62 4409.45,629.92 D43.2@4409.45,236.22
FRET_4: D9.2 D16.2 D23.2 D30.2 D37.2 D44.2 U2.59 | length 7209
  Top Layer w10: U2.59@510.79,2525.39 510.79,2597.4 551.18,2637.8 5196.85,2637.8 5275.59,2559.06 5275.59,2204.72 5275.59,1811.02 5275.59,1417.32 5275.59,1023.62 5275.59,629.92 D44.2@5275.59,236.22
FRET_5: D10.2 D17.2 D24.2 D31.2 D38.2 D45.2 U2.61 | length 8204.8
  Top Layer w10: U2.61@471.42,2525.39 471.42,2548.52 472.44,2549.55 472.44,2657.48 492.13,2677.17 6062.99,2677.17 6141.73,2598.43 6141.73,2204.72 6141.73,1811.02 6141.73,1417.32 6141.73,1023.62 6141.73,629.92 D45.2@6141.73,236.22
FRET_6: D11.2 D18.2 D25.2 D32.2 D39.2 D46.2 U2.62 | length 9146.3
  Top Layer w10: U2.62@451.73,2525.39 451.73,2676.14 492.13,2716.54 6909.45,2716.54 7007.87,2618.11 7007.87,2204.72 7007.87,1811.02 7007.87,1417.32 7007.87,1023.62 7007.87,629.92 D46.2@7007.87,236.22
GND: C1.1 C2.1 C3.1 C4.1 C5.1 C6.1 C7.1 C8.1 C9.1 C10.1 C11.1 C12.1 C21.1 C22.1 C23.1 C24.1 C25.1 C26.1 C27.1 C28.1 C29.1 C30.1 C31.2 C32.2 C33.2 C34.2 C35.2 C36.1 P1.5 P1.6 P2.2 P46.5 R2.2 R8.1 R9.1 R17.1 R20.1 R30.2 RP1.1 SW2.2 SW3.2 SW4.2 SW5.2 U1.2 U2.12 U2.18 U2.63 U3.2 U8.3 U8.11 U8.15 U8.17 U9.4 U10.8 U10.20 U10.23 U10.35 U10.39 U10.40 U10.47 U11.2 X1.2 X1.4 X2.2 X2.4 | length 257.9
  Top Layer w10: v1(370,1690) 385,1705 U9.4@428.98,1705 ; X2.4@378.46,488.31 378.46,492.24 398.09,511.87 402.02,511.87 434.31,544.16 434.31,548.76 448.03,562.48 C30.1@450,562.48 ; C35.2@380,612.48 392.72,599.76 399.54,599.76 400.54,598.76 411.23,598.76 434.8,575.2 435.31,575.2 440,570.51 C30.1@440,562.48
  other v1: -15,240 250,295 272.91,333.47 275,400 78.95,422.89 45,570 265,610 355,645 205,670 -165,725 -65,835 350,865 -60,945 75,1000 -82.53,1111.35 200,1165 110,1210 -50,1280 -125,1405 90,1415 375,1545 375,1740 410,1925 605,1955 750.65,1958.46 690,1970 200,1975 210,2090 10,2125 -295,2165 -90,2245 140,2245 -85,2415 1437.01,2440.94 1594.49,2440.95 1751.97,2440.95 1909.45,2440.95 2066.93,2440.95 2224.41,2440.95 2381.89,2440.95 2539.37,2440.95 2755.91,2440.94 2913.39,2440.94 3070.87,2440.94 3228.35,2440.94 3385.83,2440.94 3622.05,2440.95 3779.53,2440.95 3937.01,2440.95 4094.49,2440.95 4251.97,2440.95 4488.19,2440.94 4645.67,2440.94 4803.15,2440.94 4960.63,2440.94 5118.11,2440.94 5354.33,2440.94 5511.81,2440.94 5669.29,2440.94 5826.77,2440.94 5984.25,2440.94 6220.47,2440.94 6377.95,2440.94 6535.43,2440.94 6692.91,2440.94 6850.39,2440.94 7086.61,2440.95 7244.09,2440.95 7401.57,2440.95 7559.06,2440.95 7716.54,2440.95 280,2480 805,2510 -190,2520 -85,2540 807.09,2559.06 505,2640 -290,2650 120,2660
I2S_CK: U2.34 U8.16 | length 941
  Top Layer w10: U8.16@265.47,1677.09 265.47,1750.47 335,1820 335,1951.21 347.94,1964.15 347.94,1977.94 v1(350,1980) ; v1(405,2160) 435,2190 730,2190 747.95,2172.05 U2.34@785.39,2172.05
  Bottom Layer w10: v1(350,1980) 350,2105 v1(405,2160)
I2S_SD: U2.36 U8.1 | length 1016.3
  Top Layer w10: U8.1@237.91,1649.53 237.91,1762.91 315,1840 315,1996.91 325.42,2007.33 v1(325.42,2009.58) ; v1(340,2129.65) 359.65,2129.65 380,2150 380,2175 416.42,2211.42 U2.36@785.39,2211.42
  Bottom Layer w10: v1(325.42,2009.58) 325.42,2110.42 340,2125 v1(340,2129.65)
I2S_WS: U2.33 U8.14 | length 895.2
  Top Layer w10: U8.14@304.84,1677.09 304.84,1719.84 350,1765 350,1945 375,1970 v1(380,1970) ; v1@430,2150 450,2170 509.15,2170 510.97,2171.81 726.98,2171.81 746.08,2152.71 785.05,2152.71 U2.33@785.39,2152.36
  Bottom Layer w10: v1(380,1970) 380,2095 v1(430,2145)
KEY1: C25.2 R23.2 SW3.1 U2.3 | length 586.3
  Top Layer w10: v1(290,2435) 292.61,2432.39 292.61,2424.82 305.38,2412.05 307.7,2412.05 311.48,2408.27 U2.3@334.61,2408.27
  Bottom Layer w10: C25.2@-220,2452.48 -174.65,2452.48 -163.82,2463.31 SW3.1@-159.88,2463.31 SW3.1@-20.12,2463.31 -16.18,2463.31 -5.35,2452.48 272.52,2452.48 v1(290,2435)
KEY2: C26.2 R24.2 SW4.1 U2.4 | length 614
  Top Layer w10: v1(285,2390) 286.42,2388.58 U2.4@334.61,2388.58
  Bottom Layer w10: C26.2@-220,2272.48 -174.65,2272.48 -163.82,2283.31 SW4.1@-159.88,2283.31 SW4.1@-20.12,2283.31 29.17,2283.31 R24.2@40,2272.48 41.97,2272.48 54.69,2285.2 54.69,2287.17 157.52,2390 v1(285,2390)
LED1_Link: D1.2 U10.10 | length 616.7
  Top Layer w10: v1(135,520) 160.85,520 184.4,543.55 219.1,543.55 U10.10@219.45,543.9 ; D1.2@235,912.48 v1(235,945)
  Bottom Layer w10: v1(135,520) 175,520 235,580 v1(235,945)